# Altium PCB PCB1.PcbDoc
Units mil, origin at the board's own origin, x right, y up, seen from the top; angles counter-clockwise.
Board outline 1900 x 1595 mil, 2 copper layers (Top Layer, Bottom Layer); 12 components, 9 nets, 34 pads, 0 vias.
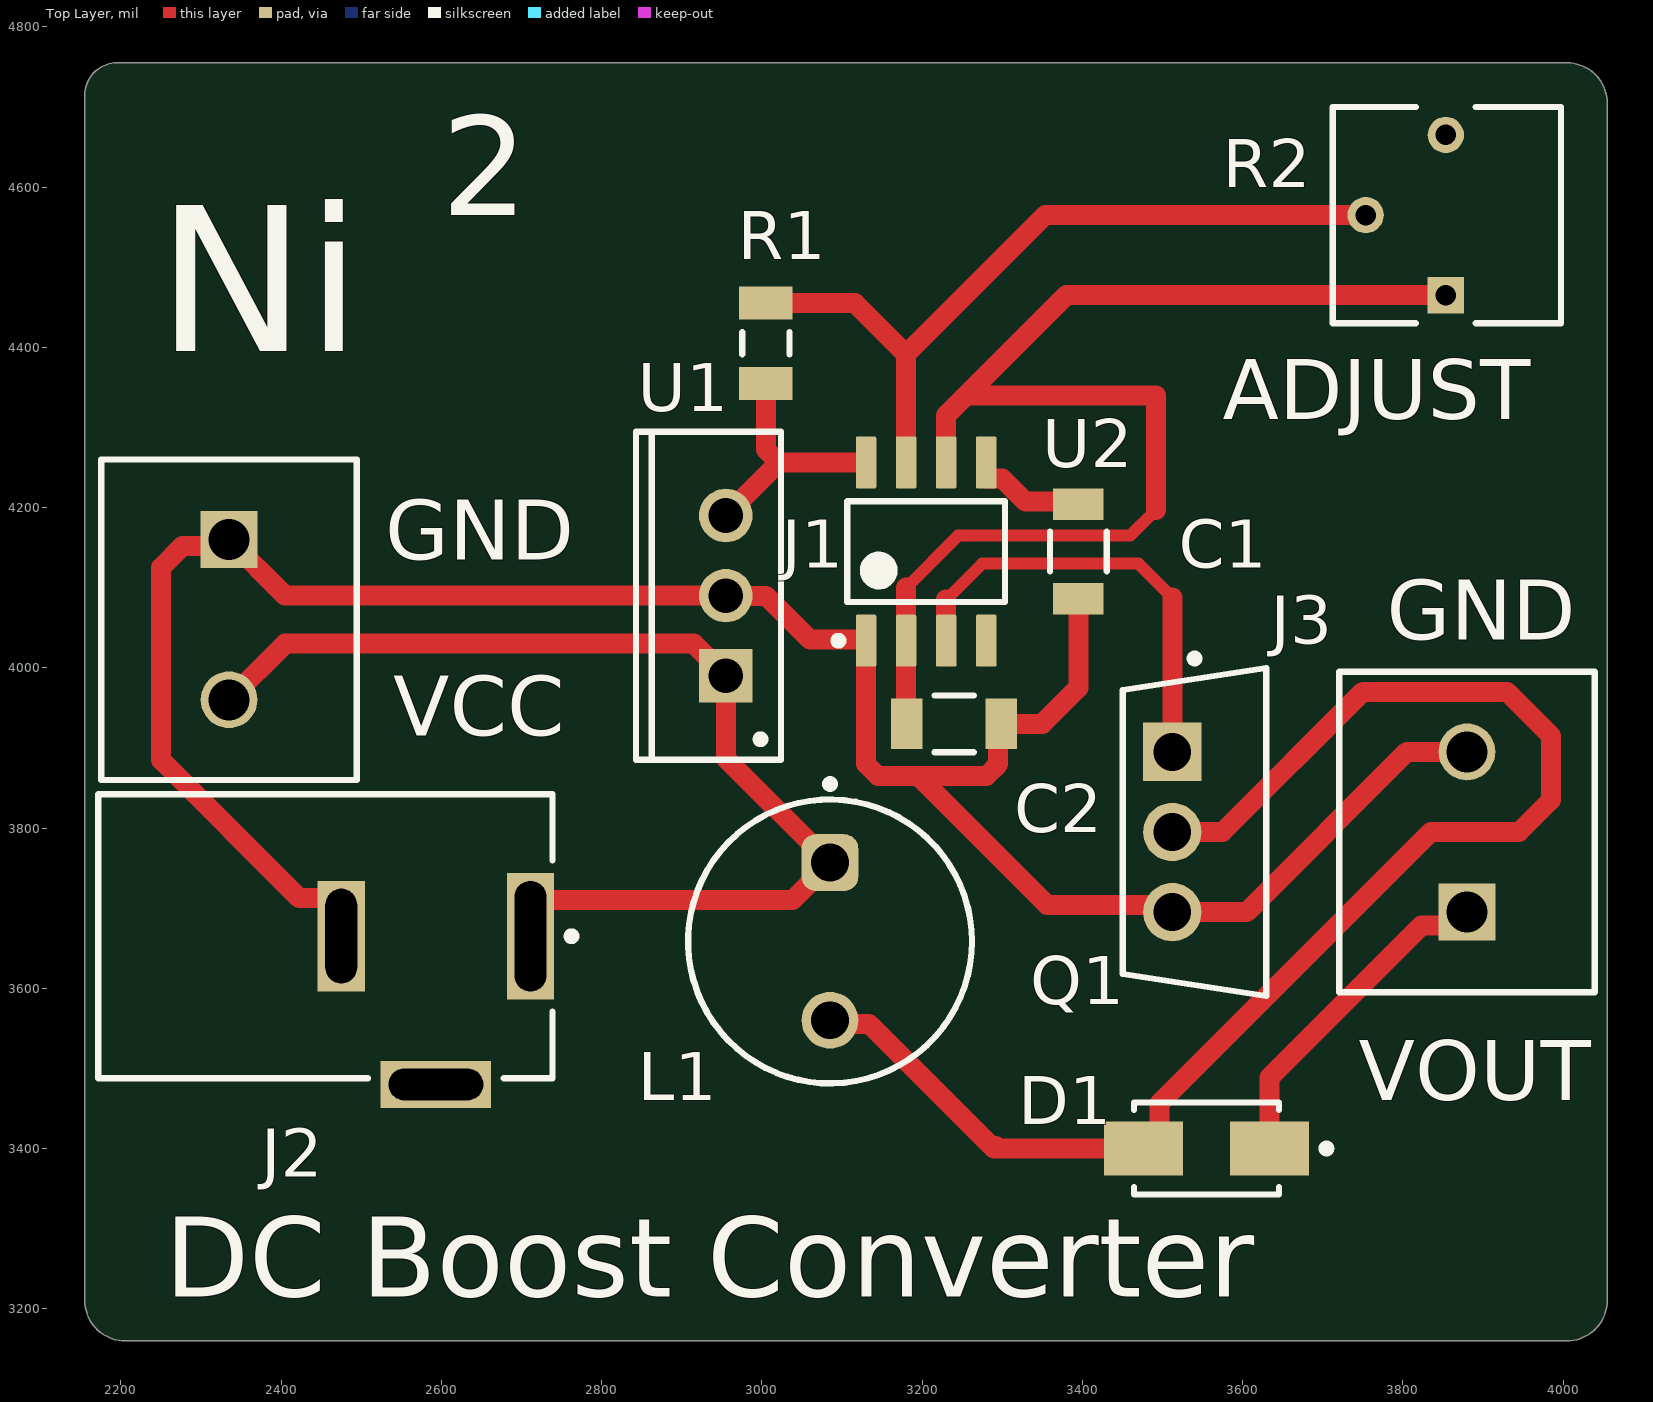
[diagram p0: Top Layer view]
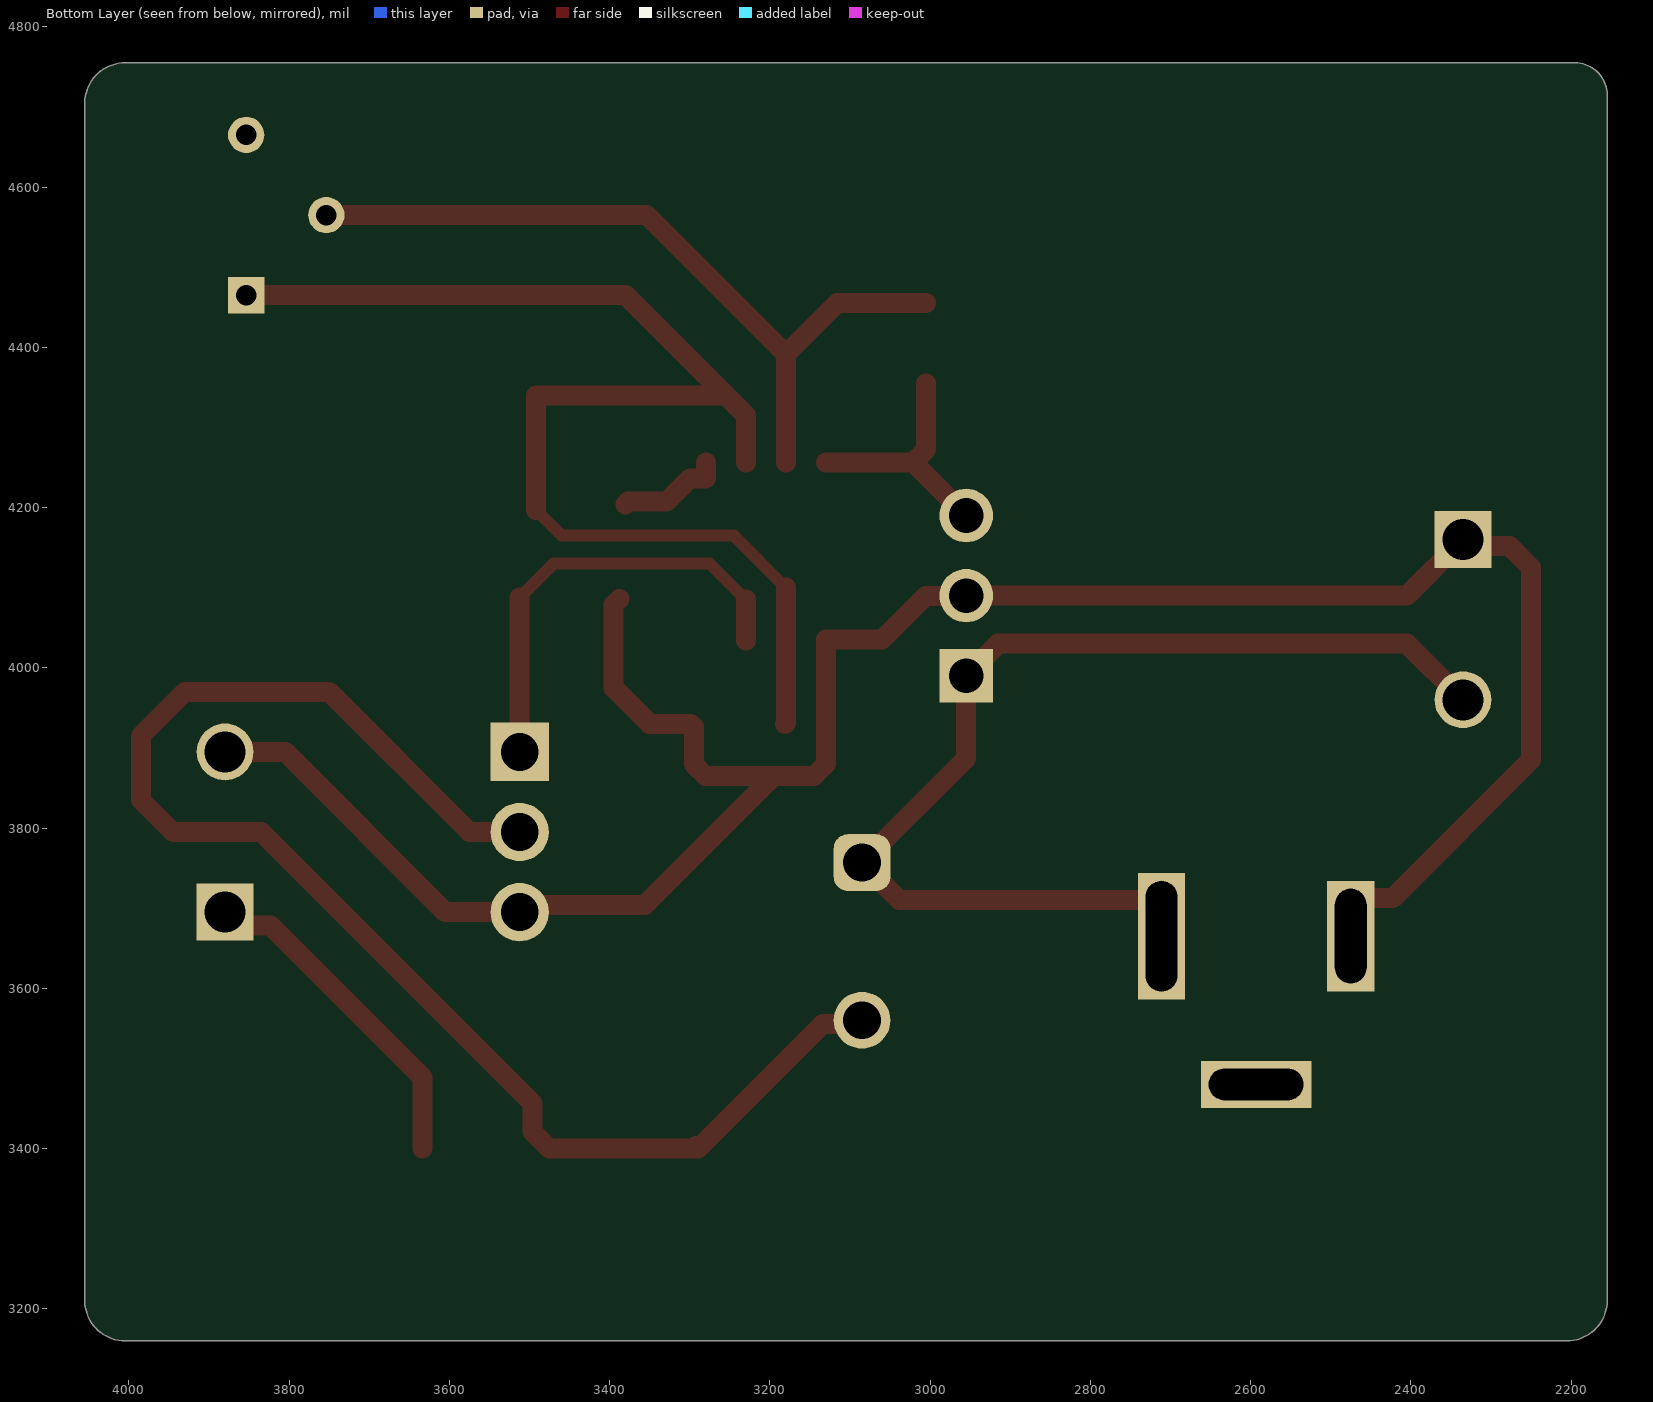
[diagram p1: Bottom Layer view, seen from below]
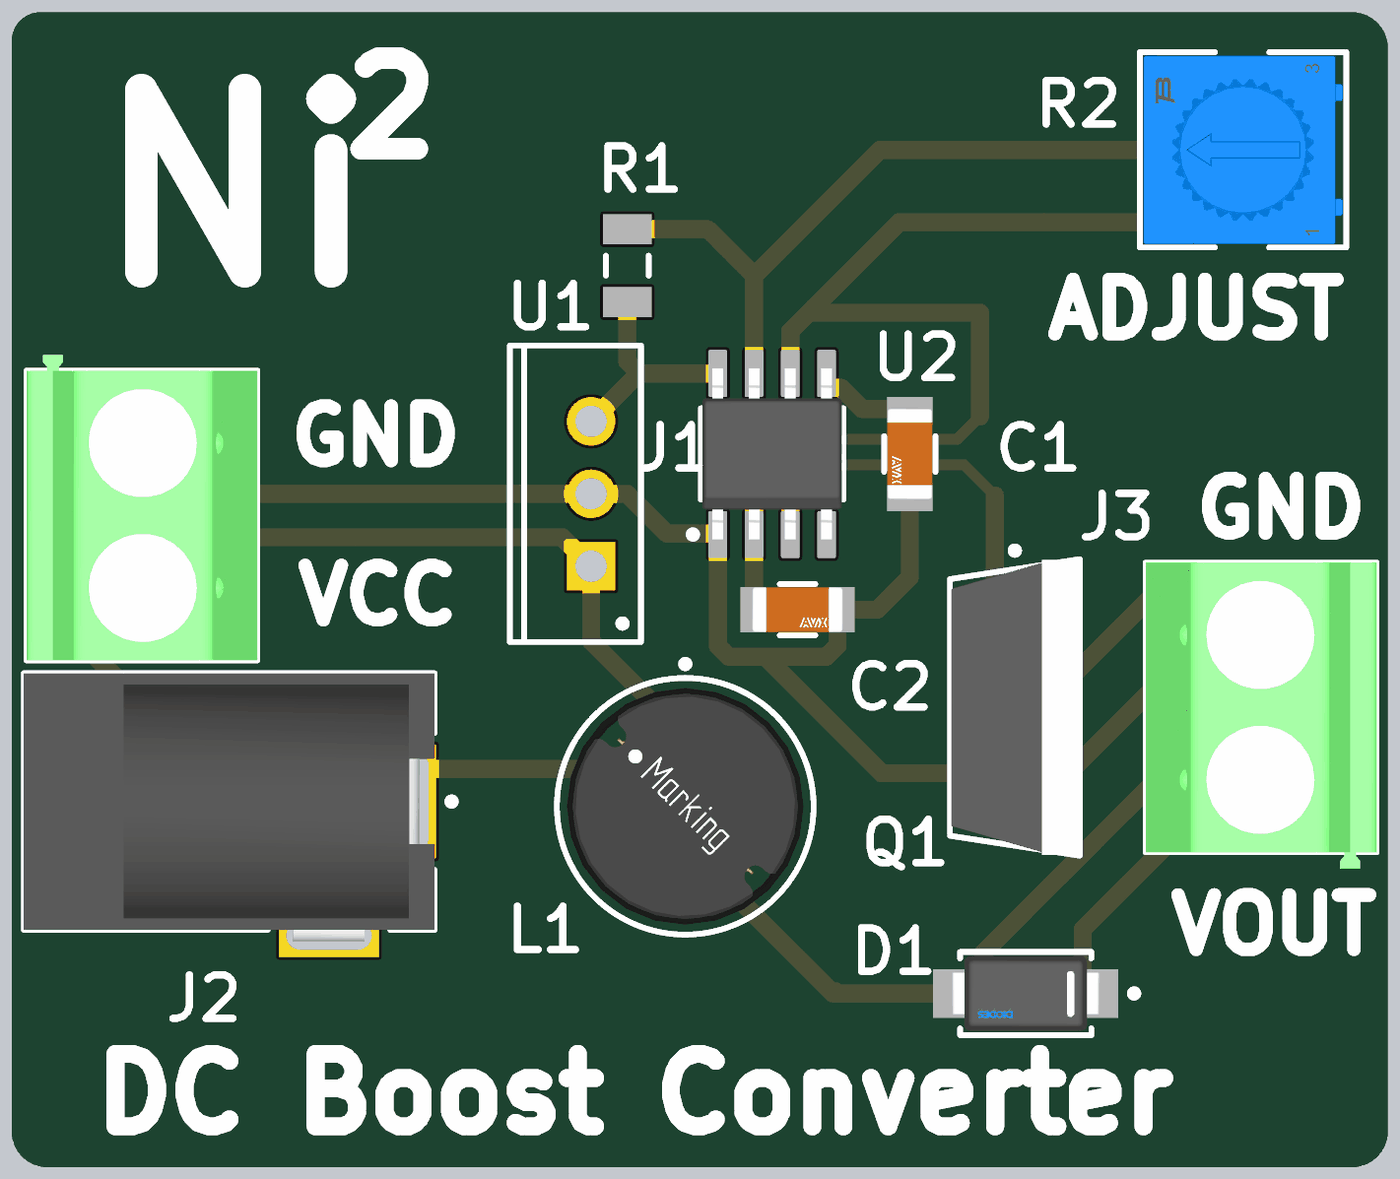
[diagram p2: 3D render of the assembled board from above, using the file's embedded part models]

## Layer stack, top to bottom
Top Solder: solder mask 0.4, Solder Resist, Dk 3.5
Top Layer: signal copper 1.4
Dielectric 1: dielectric 12.6, FR-4, Dk 4.8
Bottom Layer: signal copper 1.4
Bottom Solder: solder mask 0.4, Solder Resist, Dk 3.5

## Board outline
2155,3210 2155,4715 cw(c2195,4715) 2195,4755 4005,4755 cw(c4005,4705) 4055,4705 4055,3210 cw(c4005,3210) 4005,3160 2205,3160 cw(c2205,3210)

## Design rules (kind name [scope] priority, off if disabled: settings)
Clearance [All] p1: gap=10 ignorepadtopadclearanceinfootprint=FALSE
PolygonConnect [All] p1: connectstyle=Relief reliefconductorwidth=10 reliefentries=4 polygonreliefangle="90 Angle" airgapwidth=10
RoutingVias [All] p1: holewidth=28 width=50 viastyle="Through Hole" minholewidth=28 minwidth=50 maxholewidth=28 maxwidth=50
SolderMaskExpansion [All] p1: expansion=4 istentingtop=FALSE
SupplyNets "Schematic Supply Nets_2" [InNet('5V')] p1: voltage=0.000
SupplyNets "Schematic Supply Nets_1" [InNet('9V')] p2: voltage=0.000
SupplyNets "Schematic Supply Nets" [InNet('GND')] p3: voltage=0.000
Width [All] p1: maxlimit=25 minlimit=10 preferedwidth=25 toplayer_minwidth=15 bottomlayer_maxwidth=10 bottomlayer_prefwidth=10 minimp=50.000000 maximp=50.000000 favimp=50.000000
30 further rules are at their usual default settings.

## Components (designator, comment, footprint, x,y, rotation, side; value= is the part's Value field where it differs from the comment)
C1 "12061C104KAZ2A" FP-1206-L_3_2_0_2-W_1_6_0-MFG 3395,4145 r270 top
C2 "12061C104KAZ2A" FP-1206-L_3_2_0_2-W_1_6_0-MFG 3240,3930 r0 top
D1 "S1B-13-F" FP-SMA-MFG 3555,3400 r180 top
J1 "1729128" PHOE-1729128-2_V 2335,4060 r270 top
J2 "PJ-002A" CUI-PJ-002A_V 2593.11,3665 r180 top
J3 "1729128" PHOE-1729128-2_V 3880,3795 r90 top
L1 "744741472" WE-TI_8055 3085,3658.43 r270 top
Q1 "IRLZ44NPbF" FP-PG-TO220-3-MFG 3540,3795 r0 top
R1 "CRCW12061K00JNEAHP" RESC3116X65X50LL20T20 3005,4405 r90 top
R2 "3362P-1-104TLF" FP-3362P-T-MFG 3855,4565 r90 top
U1 "L7805CV" TO220 2955,4090 r90 top
U2 "LM555CM/NOPB" D0008A_M 3205,4145 r90 top

## Footprints (in the part's own frame and the unit in brackets; to place one, negate y for a bottom-side part, rotate by r counter-clockwise, add the part's x,y. Pads: shape width x height; smd on the part's side, far side on the other; paste and mask are expansions set on the pad)
CUI-PJ-002A_V [mm] "THD, 3-Leads, Body 14.4x9mm, Height 11mm"
  rect 1.5x4 hole 1 slot 3.5 at 90 deg: 1(-3,0)
  rect 1.5x3.5 hole 1 slot 3 at 90 deg: 2(3,0)
  rect 3.5x1.5 hole 1 slot 3 at 0 deg: 3(0,4.7)
  silkscreen extent -4.43,-4.5 10.7,4.5, body extent -3.7,-4.5 10.7,4.9, height 11
D0008A_M [mm] "SOIC, 8-Leads, Body 5x4mm, Pitch 1.27mm, IPC Low Density"
  rrect15% 1.65x0.65 smd: 1(-2.825,1.905) 2(-2.825,0.635) 3(-2.825,-0.635) 4(-2.825,-1.905) 5(2.825,-1.905) 6(2.825,-0.635) 7(2.825,0.635) 8(2.825,1.905)
  silkscreen extent -2.95,-2.5 1.6,2.9, body extent -3,-2.45 3,2.45, height 1.63
FP-1206-L_3_2_0_2-W_1_6_0-MFG [mm]
  rect 1x1.6 smd paste+0 mask+0: 1(-1.5,0) 2(1.5,0)
  silkscreen extent -0.63,-0.9 0.63,0.9, body extent -2.1,-1 2.1,1, height 0.25
FP-3362P-T-MFG [mm]
  rect 1.15x1.15 hole 0.65 paste-2539.97 mask+0: 1(-2.54,0.035)
  round 1.15 hole 0.65 paste-2539.97 mask+0: 2(0,2.575) 3(2.54,0.035)
  silkscreen extent -3.42,-3.62 3.42,3.62, body extent -3.52,-3.72 3.52,3.72, height 0.25
FP-PG-TO220-3-MFG [mm]
  rect 1.85x1.85 hole 1.2 paste-2539.97 mask+0: 1(-0.705,2.54)
  round 1.85 hole 1.2 paste-2539.97 mask+0: 2(-0.705,0) 3(-0.705,-2.54)
  silkscreen extent -2.27,-5.2 2.27,5.62, body extent -2.37,-5.55 2.37,5.55, height 0.25
FP-SMA-MFG [mm]
  rect 2.5x1.7 smd paste+0 mask+0: 1(-2,0) 2(2,0)
  silkscreen extent -3.93,-1.46 2.3,1.46, body extent -3.35,-1.56 3.35,1.56, height 0.25
PHOE-1729128-2_V [mm] "Receptacle, 2-Leads, Body 8.1x10.16mm, Pitch 5.08mm"
  rect 1.8x1.8 hole 1.3: 1(-2.54,0)
  round 1.8 hole 1.3: 2(2.54,0)
  silkscreen extent -5.08,-4.05 5.08,4.05, body extent -5.65,-4.05 5.08,4.05, height 10.01
RESC3116X65X50LL20T20 [mm] "Chip Resistor, 2-Leads, Body 3.10x1.60mm, IPC High Density"
  rect 1.05x1.7 smd: 1(-1.275,0) 2(1.275,0)
  silkscreen extent -0.35,-0.75 0.35,0.75, body extent -1.65,-0.9 1.65,0.9, height 0.65
TO220 [mm] "TO, Thru-Hole, Vertical, Heatsink Mounted; 3 In-Line Leads; Pitch 2.54 mm"
  rect 1.7x1.7 hole 1.1: 1(-2.54,0)
  round 1.7 hole 1.1: 2(0,0) 3(2.54,0)
  silkscreen extent -5.2,-1.75 5.2,2.85, body extent -5.25,-1.8 5.25,2.9, height 19.7
WE-TI_8055 [mm] "Radial Leaded Wire Wound Inductor, body diameter 8.5mm"
  rrect50% 1.8x1.8 hole 1.2: 1(-2.5,0)
  round 1.8 hole 1.2: 2(2.5,0)
  silkscreen extent -5.12,-4.5 4.5,4.5, body extent -5.87,-5.87 5.87,5.87, height 5.55

## Part data
C1 C2: library part CMP-04427-004798-1, "General Purpose Ceramic Capacitor, 1206, 100nF, 10%, X7R, 15%, 100V", Capacitance=100nF, Case Code (Imperial)=1206, Case Code (Metric)=3216, Dielectric=X7R, Max Operating Temperature=125°C, Min Operating Temperature=-55°C, Package Quantity=1, Tolerance=10%, Voltage Rating=100V, Case/Package=1206, Construction=Flat, Depth=1.6mm, Features="Soft Termination", Lead Free="Lead Free", Length=3.2mm, Mount="Surface Mount", Number of Pins=2, Packaging="Tape and Reel", Radiation Hardening=No, REACH SVHC="No SVHC", RoHS Compliant=Yes, Series=FLEXITERM®, Termination=SMD/SMT, Thickness=0.05inch, Voltage Rating (DC)=100V, Width=0.063inch
D1: library part CMP-12791-000051-1, "DIODE GEN PURP 100V 1A SMA", Average Rectified Current=1A, Capacitance=10pF, Case/Package=SMA, Forward Voltage=1.1V, Max Operating Temperature=150°C, Max Repetitive Reverse Voltage (Vrrm)=100V, Max Surge Current=30A, Min Operating Temperature=-65°C, Package Quantity=5000, Peak Reverse Current=5uA, Contact Plating=Tin, Current Rating=1A, Element Configuration=Single, Forward Current=1A, Height=2.1mm, Lead Free="Lead Free", Length=4.6mm, Max Reverse Voltage (DC)=100V, Mount="Surface Mount", Number of Pins=2, Output Current=1A, Packaging="Tape and Reel", Peak Non-Repetitive Surge Current=30A, Polarity=Standard, Radiation Hardening=No, Recovery Time=1.8us, Reverse Recovery Time=3us, Reverse Voltage (DC)=100V, Termination=SMD/SMT, Voltage Rating (DC)=100V, Weight=0.002258oz, Width=2.92mm
J1 J3: library part CMP-2000-05815-1, "PCB Terminal Block, 13.5 A, 400 V, 2-Pin THD, RoHS, Bulk", Current Rating=13500mA, Manufacturer="Phoenix Contact", Package Description="2-Pin Through Hole Device, Body 8.1 x 10.16 mm, Pitch 5.08 mm", Package Reference=1729128-2, Package Version=03/2015, Voltage Rating=400V, Datasheet URL=https://datasheet.ciiva.com/16046/1729128-16046181.pdf, Datasheet Version=12/2013, Manufacturer URL=http://www.phoenixcontact.com/, Mounting Technology=ThroughHole, No. of Positions=2, No. of Rows=1, Orientation=Horizontal, Package URL=https://www.phoenixcontact.com/online/portal/pi/pxc/product_detail_page/!ut/p/b1/3VdJjqNKFDxLH8AFycySyWY2ozFsEPOMMQaDOX1XedGL_1Vdm5YXJleknhSKeBkvI6EA8ncAo3AYoDhBQGco6KN7VURTdemj9us_IEKEZo_YHiPAEWEFmDGOHMORkqKYCORBZxgL7ZoaZYcbFFUZ3fqxSY6GOuxydWUuHqz1ynmMFygu583Bob0Ewr6Sd_l-5m-kAueHiB0jpRwZwe58wwtkpxtMYd_LmGcDRU02dRNEyWt6Y2ti5pSyJ_reIkzIulrqApdnbT11V5jnCKbYNCvhEM1MCpPByat_X379-iThf08CI5GfOPqfBeS3BRoBOdD55AKVv0iLwCMq-2BrzXWSGRH7pUGD9uwXQjiph3xL0DKQwdGa0JImiIOmBNOestqgwTHSSs2oOep-78apyXQBvNi8ZLaFjvjWvcaUEBu0MC6Wbe-d6mB0FAebo2lUWinqYaZs5DAYzV0RP9yitUjnGJ0iI9xhZkT42OCQNUJJhkgWINNQLP2JFP6OpMg3JCVg70jqHT0lvKOnhHf0lPuOnnLf0VPuWx6_dxwUIvwk5WMkT0kLL1mh61l2yZVSzG3pYV_bqo-mj6uMKwKwdnnW8Jh5RTOJzMOA5c-eJDaZQw4mTMPH02PvS_ZAqNVjVTo2WyYLkwH_KU1mmmG5kjRhDqPXLwwVHvVOjCM60-fpXvTDfMGW1PVFVS1r4e4yVDk4ZdNbkUHvqPqQSeian4UD39fNKmachqdJ1NJbyk8rXT9mXTvPk3oE5meulKGgiruPJek-4I9hTT6G8ZLOyRSm2RRVbThERQad5OS28hdt4YW4vG0stgYYzsWsK4_7y6DZMjJSCqri1kyiZR5vD7pwIrNR7QwPHTcLTI5qT7eRlpHrdGiupYlqQDJ7zy_CND8fWWBoLRXxk1RVcXiBQwbTD4Xi7KL-FuO94t9xaqweXzH, Packing=Bulk, PartNumber=1729128, Pitch=5.08mm, RoHS=TRUE
J2: library part CMP-2000-06895-2, "Through Hole Right Angle DC Power Jack, 2.5 A, 2 mm Center Pin, 3 Position, -25 to 85 degC, RoHS, Bulk", Current Rating=2.5A, Flammability Rating=UL94V-0, Insulation Resistance=50MOhms, Manufacturer=CUIInc., Operating Temperature Range=-25Cto+85C, Package Description="3-Pin Through Hole Device, Body 14.4 x 9 mm, Height 11 mm", Voltage Rating=24V, Brand=CUI, Connector Type=DCPowerJack, Contact Gender=Male, Contact Material=Copper, Contact Plating=Nickel, Datasheet URL=http://www.cui.com/product/resource/pj-002a.pdf, Datasheet Version="Rev. 1.03, 04/2016", Factory Pack Quantity=500, Housing Material=PolybutyleneTerephthalate(PBT), Inside Contact Diameter=2mm, Manufacturer URL=http://www.cui.com/, Mounting Angle=Right, Mounting Style=ThroughHole, Mounting Technology=ThroughHole, Outside Contact Diameter=6.5mm, Package Reference=PJ-002A, Product=Jacks, Product Category=DCPowerConnectors, RoHS=True, Termination Style=ThroughHole
L1: library part CMP-0225-00009-3, Ambient Temperature Range High=85°C, Ambient Temperature Range Low=-40°C, Case/Package=Radial, Current Rating=150mA, DC Resistance (DCR)=21.18Ω, Inductance=4.7mH, Inductance Tolerance=5%, Max Operating Temperature=125°C, Self Resonant Frequency=1.3MHz, Series Resistance=23Ω, Test Frequency=1kHz, Tolerance=10%, Composition=Wirewound, Core Material=Ferrite, Diameter=8.5mm, Height=5.5mm, Height - Seated (Max)=5.9944mm, Lead Pitch=5mm, Length=8.5mm, Max DC Current=150mA, Min Operating Temperature=-40°C, Mount="Radial, Through Hole", NexarPartId=22803390, Number of Pins=2, REACH SVHC=Unknown, RMS Current (Irms)=150mA, RoHS=Compliant, Saturation Current=150mA, Shielding=Unshielded, Termination=Radial, Width=8.5mm
Q1: library part CMP-32901-000488-1, "MOSFET N-CH 55V 47A TO220AB", Case/Package=TO-220, Continuous Drain Current (ID)=47A, Drain to Source Breakdown Voltage=55V, Drain to Source Resistance=35mR, Gate to Source Voltage (Vgs)=16V, Input Capacitance=1.7nF, Max Operating Temperature=175°C, Max Power Dissipation=110W, Min Operating Temperature=-55°C, Threshold Voltage=2V, Drain to Source Voltage (Vdss)=55V, Element Configuration=Single, Halogen Free="Halogen Free", Height=0.6inch, Lead Free="Lead Free", Length=0.414inch, Max Dual Supply Voltage=55V, Mount="Through Hole", Number of Pins=3, Packaging=Rail/Tube, Power Dissipation=110W, Rds On Max=22mR, REACH SVHC="No SVHC", RoHS Compliant=Yes, Turn-Off Delay Time=26ns, Turn-On Delay Time=11ns, Width=0.185inch
R1: library part CMP-2003-04880-1, Manufacturer="Vishay Dale", Part Number=CRCW12061K00JNEAHP
R2: library part CMP-07234-000031-1, "TRIMMER 100K OHM 0.5W PC PIN TOP", Max Operating Temperature=125°C, Max Power Dissipation=500mW, Min Operating Temperature=-55°C, Package Quantity=50, Resistance=100kR, Resistor Type=Cermet, Temperature Coefficient=100ppm/°C, Tolerance=10%, Height=0.185inch, Length=0.275inch, Mount="Through Hole", Packaging=Rail/Tube, Power Rating=500mW, RoHS Compliant=Yes, Series="Trimpot® 3362 - Sealed", Technology=CERMET, Termination="PC Pin", Width=0.26inch
U1: library part CMP-0244-00483-1, "Positive Voltage Regulator, 5V, 3-Pin TO-220", ComponentLink1Description="Manufacturer URL", ComponentLink1URL=http://www.st.com, ComponentLink2Description=Datasheet, ComponentLink2URL=http://www.st.com/internet/com/TECHNICAL_RESOURCES/TECHNICAL_LITERATURE/DATASHEET/CD00000444.pdf, ComponentLink3Description="Package Specification", ComponentLink3URL=http://www.st.com/internet/com/TECHNICAL_RESOURCES/TECHNICAL_LITERATURE/PACKAGE_INFORMATION/CD00004649.pdf, DatasheetVersion=16/11/2011, PackageDescription="TO, Thru-Hole, Vertical, Heatsink Mounted; 3 In-Line Leads; Pitch 2.54 mm", PackageReference=TO220, PackageVersion=ver3.0
U2: library part CMP-0056-00105-3, "Timer, 8-pin Narrow SOIC, Pb-Free", Manufacturer="Texas Instruments", PackageTopMarking=NSZXTT*LM*555CM, PowerWise=N, Code_IPC=SOIC127P600-8, Code_JEDEC=MS-012-AA, ComponentLink1Description="Datasheet URL", ComponentLink1URL=http://www.ti.com/general/docs/lit/getliterature.tsp?genericPartNumber=LM555&fileType=pdf, CompType="Analog IC", PackageDescription="SOIC Narrow, 4.9 x 3.9 x 1.45mm, 8 Lead, 1.27mm Pitch", PackageReference=D0008A, PinCount=8, RoHS=Y

## Nets (pads, with @x,y where several pads share a name; then routed paths per layer and width w, separated by ;. In a path a pad name is that pad's centre, name@x,y a point inside that pad or via, vN(x,y) a via of type N, cw(c..) or ccw(c..) an arc to the next point about the centre after c; other vN are vias at no path point)
5V: R1.1 U1.3 U2.8 | length 307.7
  Top Layer w25: U1.3 3021.22,4256.22 ; R1.1 3005,4272.44 3021.22,4256.22 ; U2.8 3021.22,4256.22
9V: J1.2 J2.1 L1.1 U1.1 | length 1380.8
  Top Layer w25: J1.2 2405,4030 2915,4030 U1.1 2955,3886.85 L1.1 3038.15,3710 2728.25,3710 2711.22,3692.97 J2.1
555OUT: Q1.1 U2.3 | length 562.4
  Top Layer w15: 3230,4085 3275,4130 3470,4130 3512.24,4087.76
  Top Layer w25: U2.3 3230,4085 ; Q1.1 3512.24,4087.76
GND: C1.2 C2.2 J1.1 J2.2 J3.2 Q1.3 U1.2 U2.1 | length 2971.1
  Top Layer w25: J2.2 2475,3695.36 2457.97,3712.38 2422.62,3712.38 2250,3885 2250,4125 2276.71,4151.71 2326.71,4151.71 J1.1 2405,4090 U1.2 2955.18,4089.82 3005.18,4089.82 3060,4035 3129.7,4035 3130,4034.7 U2.1 3130,3880 3145,3865 3195,3865 ; C1.2@3387.81,4085.94 3395,4078.76 3395,3975 3350,3930 C2.2 3295,3925.94 3295,3879.64 3280.36,3865 3195,3865 ; J3.2 3805,3895 3605,3695 Q1.3 3503.09,3704.15 3355.85,3704.15 3195,3865
NetC1_1: C1.1 U2.5 | length 133.1
  Top Layer w25: U2.5 3280,4236.54 3280.3,4236.24 3299.98,4236.24 3328.98,4207.24 3376.81,4207.24 C1.1@3380,4204.06
NetC2_1: C2.1 R2.1 U2.2 U2.6 | length 1646.8
  Top Layer w15: 3180,4100 3245,4165 3460,4165 3491.81,4196.81
  Top Layer w25: 3180,4100 U2.2 3180,3930.94 C2.1 ; U2.6 3230,4315 3255,4340 ; 3491.81,4196.81 3491.81,4340 3255,4340 ; R2.1 3380,4465 3255,4340
NetD1_1: D1.1 J3.1 | length 420.4
  Top Layer w25: D1.1 3633.74,3488.74 3823.05,3678.05 3863.05,3678.05 J3.1
NetD1_2: D1.2 L1.2 Q1.2 | length 1819.2
  Top Layer w25: L1.2 3089.35,3555.65 3133.8,3555.65 3289.45,3400 ; 3292.28,3402.83 3289.45,3400 ; Q1.2 3575,3795 3750,3970 3930,3970 3985,3915 3985,3835 3945,3795 3835,3795 3496.32,3456.32 3496.32,3420.96 3475.36,3400 3289.45,3400
NetR1_2: R1.2 R2.2 U2.7 | length 982.1
  Top Layer w25: R1.2 3116.06,4455.2 3180,4391.26 ; U2.7 3180,4391.26 ; R2.2 3353.74,4565 3180,4391.26
pads on no net: J2.3 R2.3 U2.4

## Silkscreen, mask and mechanical layers (free items; w line width, h text height)
Top Overlay:
  text "2" at 2600,4565 h125
  text "Ni" at 2245,4395 h250
  text "ADJUST" at 3575,4310 h75
  text "GND" at 2530,4135 h75
  text "GND" at 3780,4035 h75
  text "VCC" at 2540,3915 h75
  text "VOUT" at 3745,3460 h75
  text "DC Boost Converter" at 2255,3215 h100
Mechanical 1:
  the board outline again, w20